# Altium PCB pcb sensor.PcbDoc
Units mm, origin at the board's own origin, x right, y up, seen from the top; angles counter-clockwise.
Board outline 89.99 x 89.99 mm, 2 copper layers (Top Layer, Bottom Layer); 63 components, 46 nets, 179 pads, 16 vias.
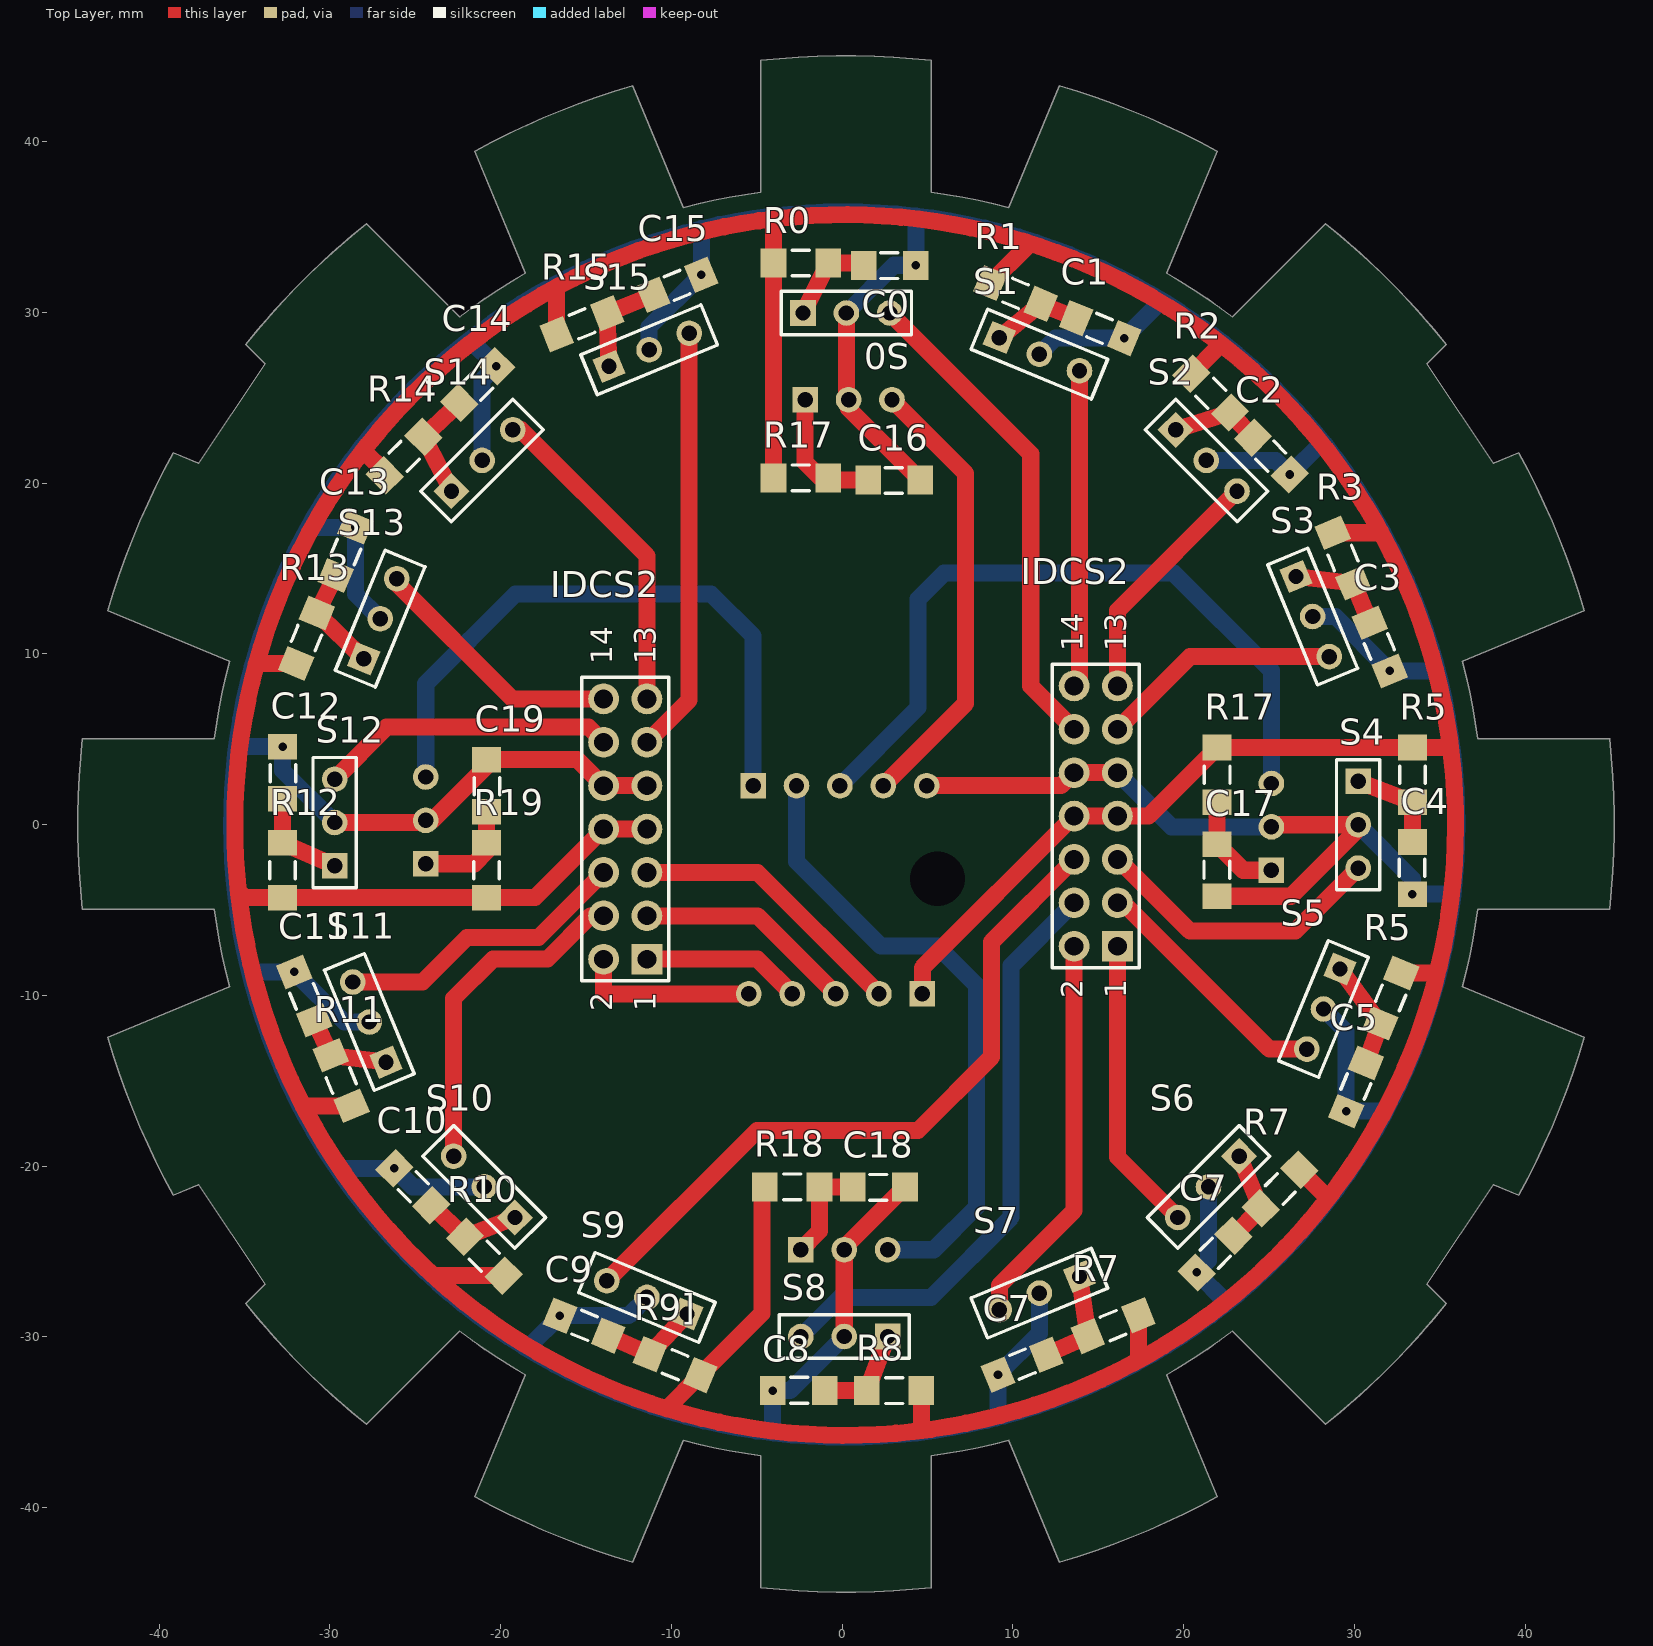
[diagram p0: Top Layer view]
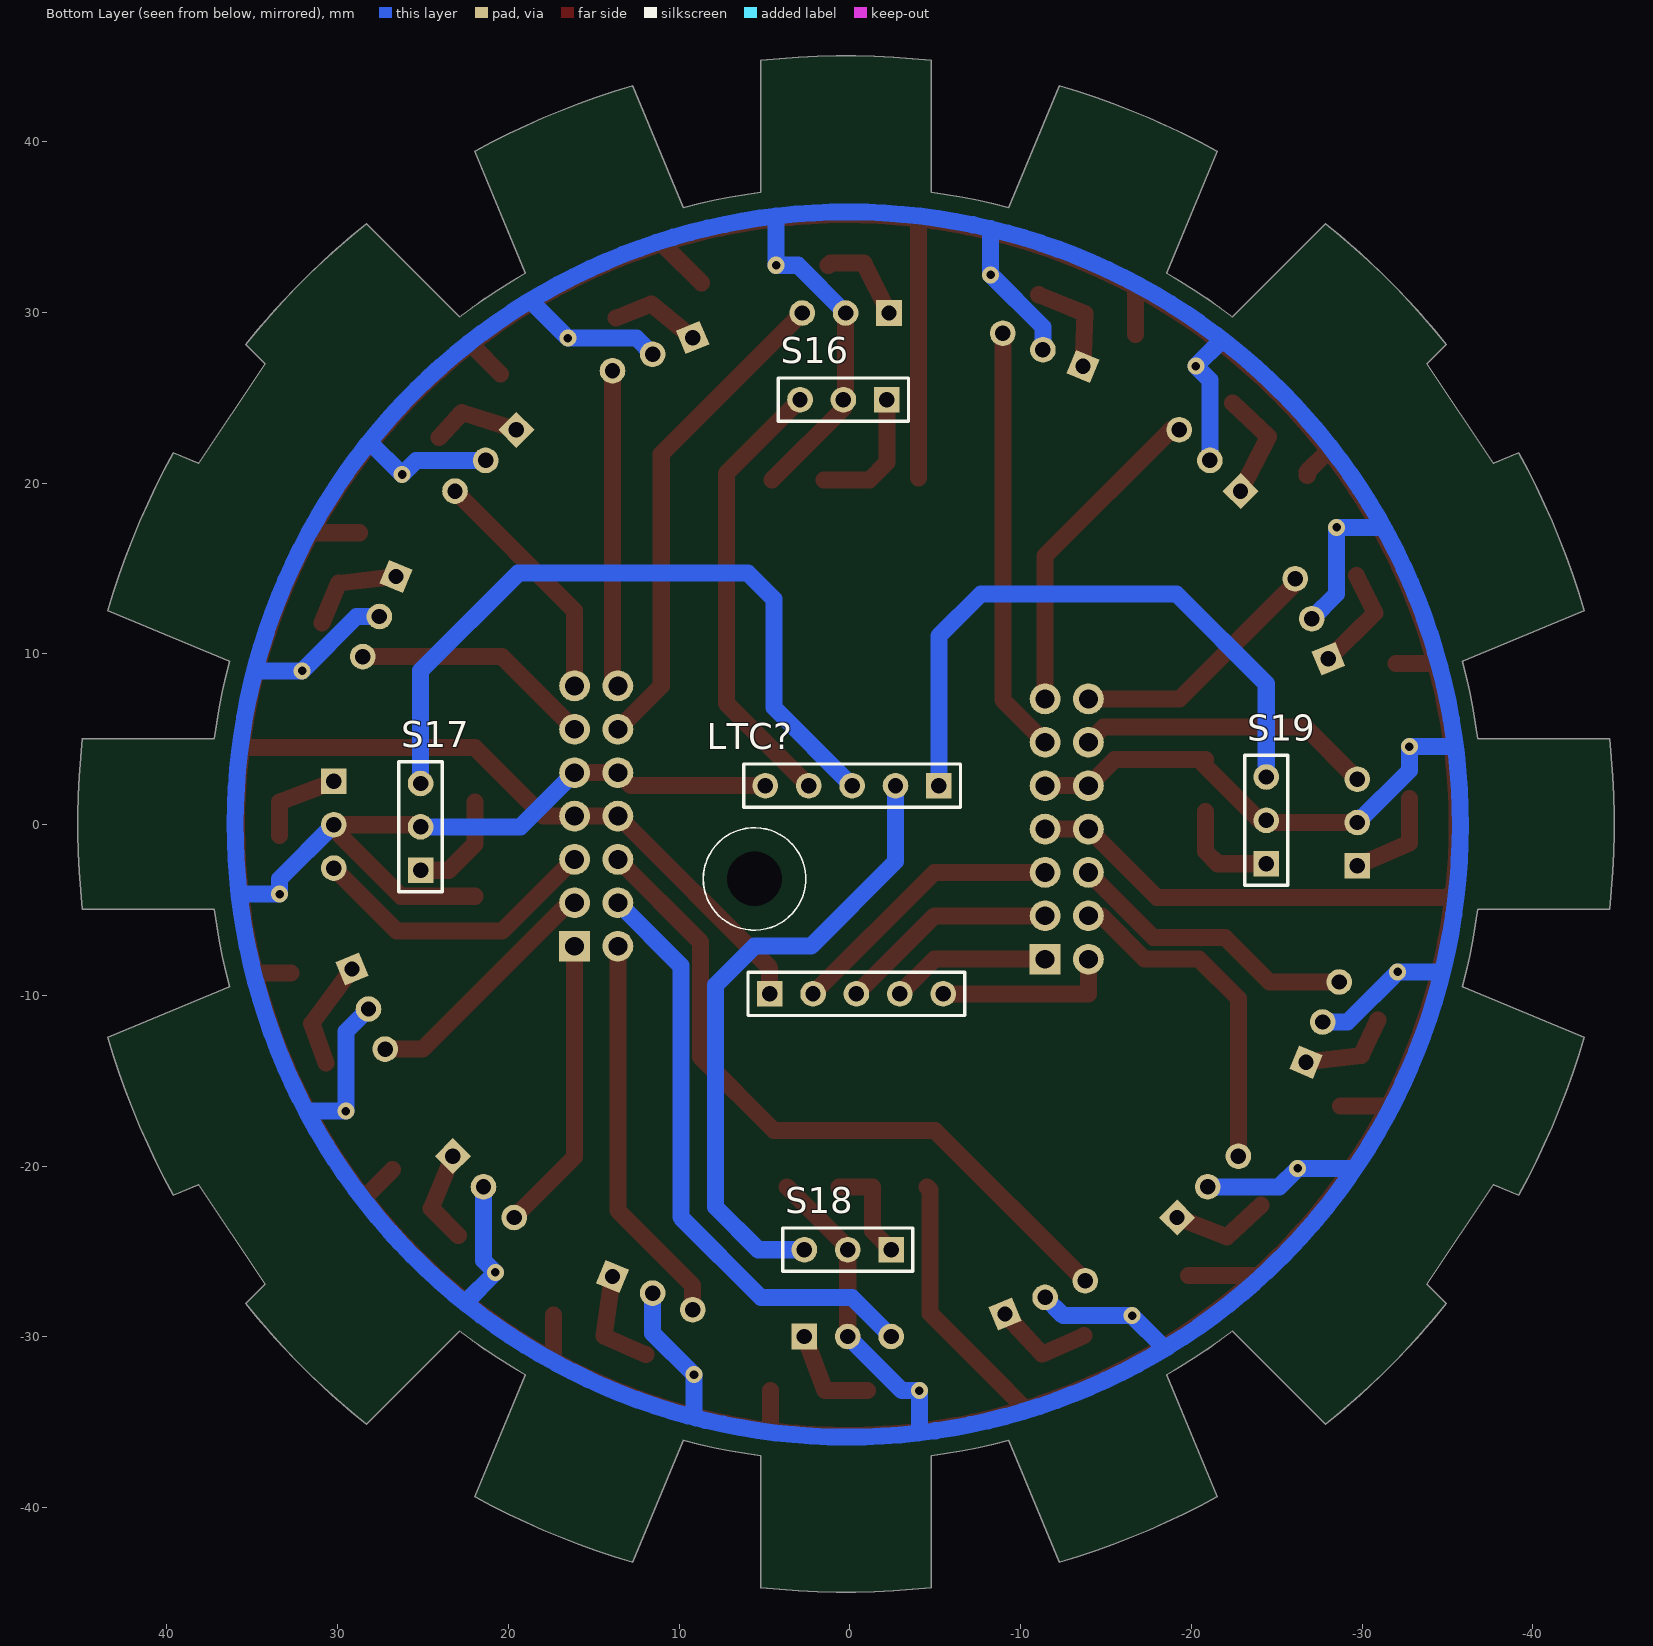
[diagram p1: Bottom Layer view, seen from below]
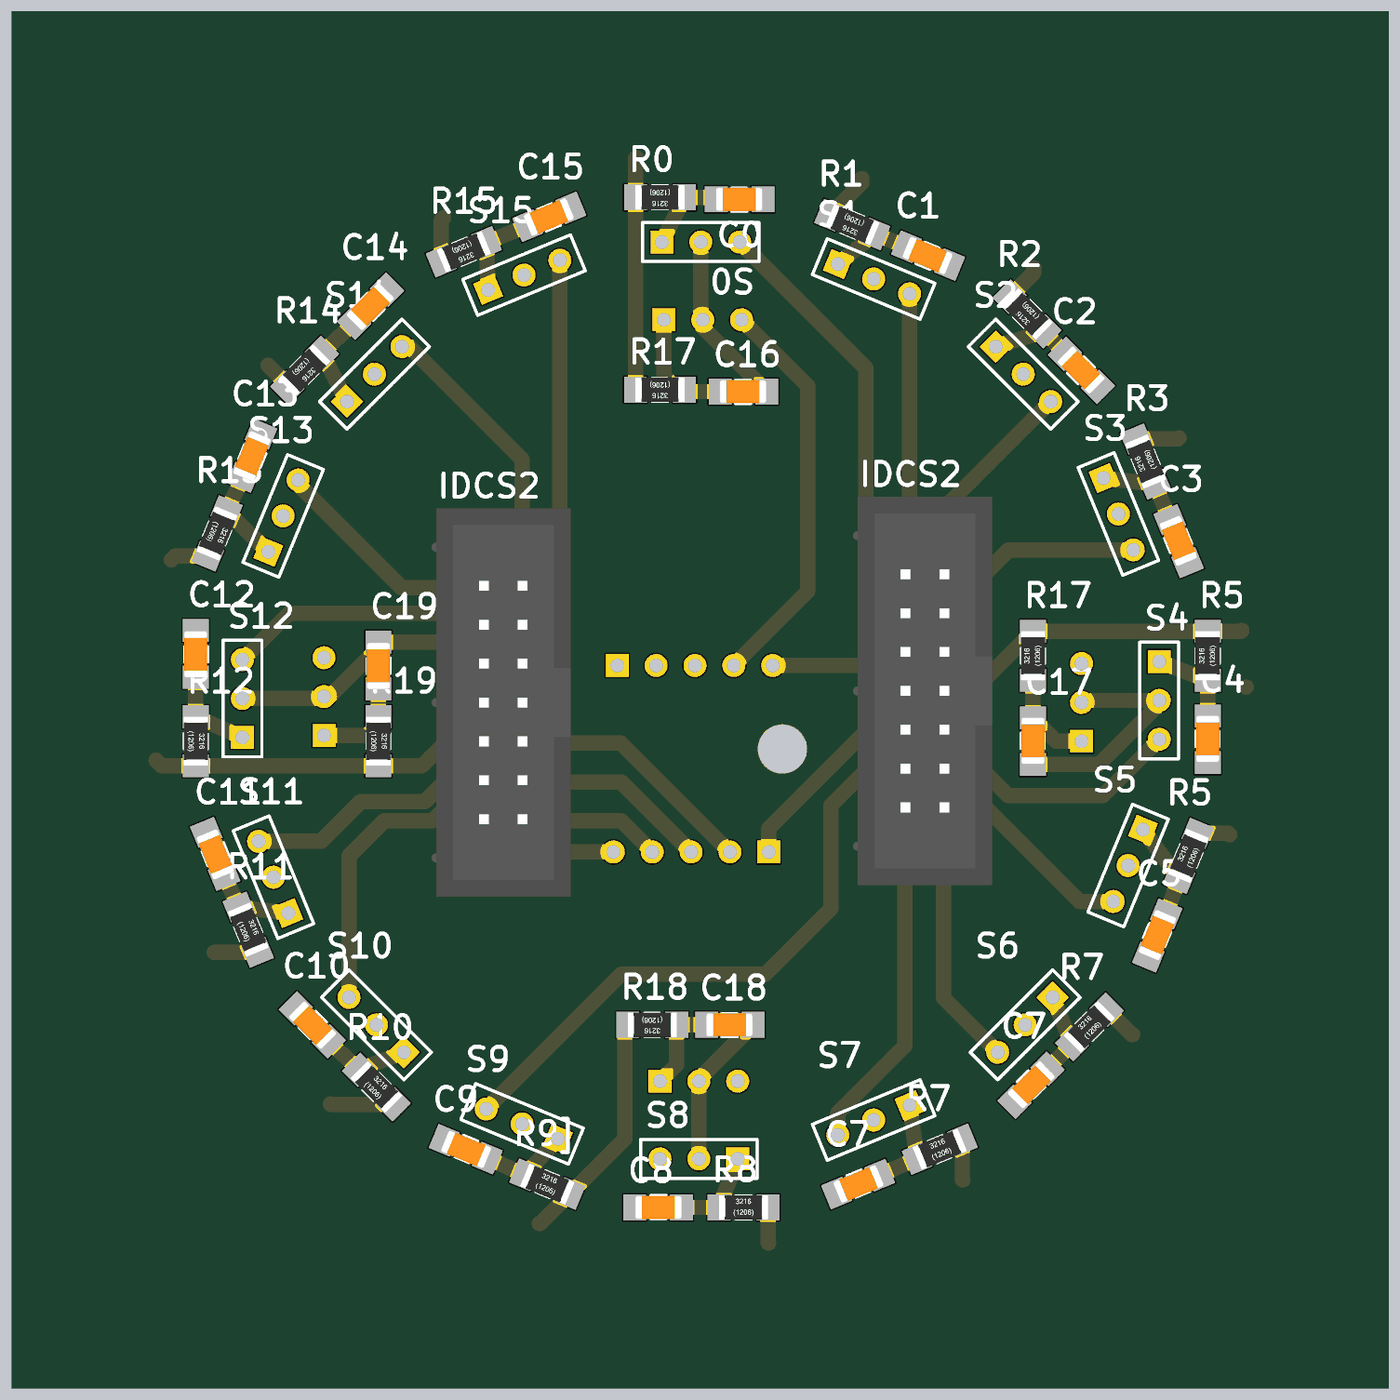
[diagram p2: 3D render of the assembled board from above, using the file's embedded part models]

## Layer stack, top to bottom
Top Solder: solder mask 0.0102, Solder Resist, Dk 3.5
Top Layer: signal copper 0.0356
Dielectric 1: dielectric 0.32, FR-4, Dk 4.8
Bottom Layer: signal copper 0.0356
Bottom Solder: solder mask 0.0102, Solder Resist, Dk 3.5

## Board outline
-34.928,-28.045 ccw(c0.23,0.042) -27.857,-35.116 -22.397,-29.656 ccw(c0.23,0.042) -18.549,-32.228 -21.504,-39.362 ccw(c0.23,0.042) -12.265,-43.189 -9.31,-36.055 ccw(c0.23,0.042) -4.77,-36.958 -4.77,-44.679 ccw(c0.23,0.042) 5.23,-44.679 5.23,-36.958 ccw(c0.23,0.042) 9.77,-36.055 12.725,-43.189 ccw(c0.23,0.042) 21.964,-39.362 19.009,-32.228 ccw(c0.23,0.042) 22.857,-29.656 28.317,-35.116 ccw(c0.23,0.042) 35.388,-28.045 34.254,-26.911 38.152,-21.078 39.634,-21.692 ccw(c0.23,0.042) 43.461,-12.453 36.327,-9.498 ccw(c0.23,0.042) 37.23,-4.958 44.951,-4.958 ccw(c0.23,0.042) 44.951,5.042 37.23,5.042 ccw(c0.23,0.042) 36.327,9.582 43.461,12.537 ccw(c0.23,0.042) 39.634,21.776 38.152,21.162 34.254,26.995 35.388,28.129 ccw(c0.23,0.042) 28.317,35.2 22.857,29.74 ccw(c0.23,0.042) 19.009,32.312 21.964,39.446 ccw(c0.23,0.042) 12.725,43.273 9.77,36.139 ccw(c0.23,0.042) 5.23,37.042 5.23,44.763 ccw(c0.23,0.042) -4.77,44.763 -4.77,37.042 ccw(c0.23,0.042) -9.31,36.139 -12.265,43.273 ccw(c0.23,0.042) -21.504,39.446 -18.549,32.312 ccw(c0.23,0.042) -22.397,29.74 -27.857,35.2 ccw(c0.23,0.042) -34.928,28.129 -33.794,26.995 -37.692,21.162 -39.174,21.776 ccw(c0.23,0.042) -43.001,12.537 -35.867,9.582 ccw(c0.23,0.042) -36.77,5.042 -44.491,5.042 ccw(c0.23,0.042) -44.491,-4.958 -36.77,-4.958 ccw(c0.23,0.042) -35.867,-9.498 -43.001,-12.453 ccw(c0.23,0.042) -39.174,-21.692 -37.692,-21.078 -33.794,-26.911

## Design rules (kind name [scope] priority, off if disabled: settings)
Clearance [All] p1: gap=0.254 ignorepadtopadclearanceinfootprint=FALSE except(0: Arc-Hole Track-Hole SMDPad-Hole THPad-Hole Via-Hole Fill-Hole Poly-Hole Region-Hole Text-Hole)
PolygonConnect [All] p1: connectstyle=Relief reliefconductorwidth=0.254 reliefentries=4 polygonreliefangle="90 Angle" airgapwidth=0.254
RoutingVias [All] p1: holewidth=0.711 width=1.27 viastyle="Through Hole" minholewidth=0.711 minwidth=1.27 maxholewidth=0.711 maxwidth=1.27
SolderMaskExpansion [All] p1: expansion=0.102
Width [All] p1: maxlimit=2 minlimit=0.5 preferedwidth=1
30 further rules are at their usual default settings.

## Classes and differential pairs
component class "sesnor schematic": C0 C1 C2 C3 C4 C5 C7 C8 C9 C10 C11 C12 C13 C14 C15 C16 C17 C18 C19 IDCS2 R0 R1 R2 R3 R5 R7 R8 R9] R10 R11 R12 R13 R14 R15 R17 R18 R19 S0 S1 S2 S3 S4 S5 S6 S7 S8 S9 S10 S11 S12 S13 S14 S15 S16 S17 S18 S19

## Components (designator, comment, footprint, x,y, rotation, side; value= is the part's Value field where it differs from the comment)
C0 "smd" "Cap SMD" 2.794,32.766 r180 top
C1 "smd" "Cap SMD" 15.113,29.083 r157.5 top
C2 "smd" "Cap SMD" 25.146,21.59 r135 top
C3 "smd" "Cap SMD" 31.496,10.414 r112.5 top
C4 "smd" "Cap SMD" 33.401,-2.54 r90 top
C5 "smd" "Cap SMD" 30.099,-15.367 r67.5 top
C7 "smd" "Cap SMD" 10.541,-31.623 r22.5 top
C7 "smd" "Cap SMD" 21.844,-25.146 r45 top
C8 "smd" "Cap SMD" -2.54,-33.147 r0 top
C9 "smd" "Cap SMD" -15.113,-29.337 r337.5 top
C10 "smd" "Cap SMD" -25.146,-21.209 r315 top
C11 "smd" "Cap SMD" -31.496,-10.033 r292.5 top
C12 "smd" "Cap SMD" -32.766,3.048 r270 top
C13 "smd" "Cap SMD" -29.083,16.002 r247.5 top
C14 "smd" "Cap SMD" -21.336,25.781 r225 top
C15 "smd" "Cap SMD" -9.652,31.623 r202.5 top
C16 "smd" "Cap SMD" 3.048,20.193 r180 top
C17 "smd" "Cap SMD" 21.971,-2.666 r90 top
C18 "smd" "Cap SMD" 2.159,-21.209 r180 top
C19 "smd" "Cap SMD" -20.828,2.286 r270 top
IDCS2 "IDC 2X7" "IDC 2X7" -12.319,0 r90 top
IDCS2 "IDC 2X7" "IDC 2X7" 15.24,0.762 r90 top
LTC? "LTC TAK" "LTC TAK" -1.524,-3.175 r0 bottom
R0 "SMD" "Resistor SMD 1206" -2.413,32.893 r180 top
R1 "SMD" "Resistor SMD 1206" 10.16,31.115 r157.5 top
R2 "SMD" "Resistor SMD 1206" 21.59,25.273 r135 top
R3 "SMD" "Resistor SMD 1206" 29.337,15.621 r112.5 top
R5 "SMD" "Resistor SMD 1206" 32.131,-10.16 r67.5 top
R5 "SMD" "Resistor SMD 1206" 33.401,2.921 r90 top
R7 "SMD" "Resistor SMD 1206" 15.875,-29.337 r22.5 top
R7 "SMD" "Resistor SMD 1206" 25.654,-21.336 r45 top
R8 "SMD" "Resistor SMD 1206" 3.048,-33.147 r0 top
R9] "SMD" "Resistor SMD 1206" -9.779,-31.623 r337.5 top
R10 "SMD" "Resistor SMD 1206" -20.955,-25.273 r315 top
R11 "SMD" "Resistor SMD 1206" -29.337,-14.986 r292.5 top
R12 "SMD" "Resistor SMD 1206" -32.766,-2.667 r270 top
R13 "SMD" "Resistor SMD 1206" -31.369,10.922 r247.5 top
R14 "SMD" "Resistor SMD 1206" -25.654,21.59 r225 top
R15 "SMD" "Resistor SMD 1206" -15.24,29.337 r202.5 top
R17 "SMD" "Resistor SMD 1206" 21.971,2.921 r90 top
R17 "SMD" "Resistor SMD 1206" -2.413,20.32 r180 top
R18 "SMD" "Resistor SMD 1206" -2.921,-21.209 r180 top
R19 "SMD" "Resistor SMD 1206" -20.828,-2.667 r270 top
S0 "Header 3" HDR1X3 -2.286,29.972 r0 top
S1 "Header 3" HDR1X3 9.21,28.531 r337.5 top
S2 "Header 3" HDR1X3 19.54,23.132 r315 top
S3 "Header 3" HDR1X3 26.587,14.539 r292.5 top
S4 "Header 3" HDR1X3 30.226,2.54 r270 top
S5 "Header 3" HDR1X3 29.166,-8.448 r247.5 top
S6 "Header 3" HDR1X3 23.259,-19.413 r225 top
S7 "Header 3" HDR1X3 13.904,-26.46 r202.5 top
S8 "Header 3" HDR1X3 2.667,-29.972 r180 top
S9 "Header 3" HDR1X3 -9.083,-28.658 r157.5 top
S10 "Header 3" HDR1X3 -19.159,-23.005 r135 top
S11 "Header 3" HDR1X3 -26.714,-13.904 r112.5 top
S12 "Header 3" HDR1X3 -29.718,-2.413 r90 top
S13 "Header 3" HDR1X3 -28.023,9.718 r67.5 top
S14 "Header 3" HDR1X3 -22.878,19.54 r45 top
S15 "Header 3" HDR1X3 -13.65,26.841 r22.5 top
S16 "Header 3" HDR1X3 -2.159,24.892 r0 bottom
S17 "Header 3" HDR1X3 25.146,-2.667 r90 bottom
S18 "Header 3" HDR1X3 -2.413,-24.892 r0 bottom
S19 "Header 3" HDR1X3 -24.384,-2.286 r90 bottom

## Footprints (in the part's own frame and the unit in brackets; to place one, negate y for a bottom-side part, rotate by r counter-clockwise, add the part's x,y. Pads: shape width x height; smd on the part's side, far side on the other; paste and mask are expansions set on the pad)
"Cap SMD" [mm]
  rect 1.5x1.7 smd: 1(-1.525,0) 2(1.525,0)
  silkscreen extent -0.47,-0.72 0.53,0.78, body extent -1.49,-0.76 1.55,0.76, height 0.75
HDR1X3 [mm] "Connector; Header; 3 Position"
  rect 1.5x1.5 hole 0.9: 1(0,0)
  round 1.5 hole 0.9: 2(2.54,0) 3(5.08,0)
  silkscreen extent -1.27,-1.27 6.35,1.27
"IDC 2X7" [mm]
  rect 1.8x1.8 hole 1.1 unplated: 1(-7.874,-0.889)
  round 1.8 hole 1.1 unplated: 2(-7.874,1.651) 3(-5.334,-0.889) 4(-5.334,1.651) 5(-2.794,-0.889) 6(-2.794,1.651) 7(-0.254,-0.889) 8(-0.254,1.651) 9(2.286,-0.889) 10(2.286,1.651) 11(4.826,-0.889) 12(4.826,1.651) 13(7.366,-0.889) 14(7.366,1.651)
  silkscreen extent -9.14,-2.16 8.64,2.92, body extent -12.83,-4.06 12.55,5.04, height 9.3
"LTC TAK" [mm]
  rect 1.5x1.5 hole 0.9: 1(6.223,6.731) 6(-3.683,-5.461)
  round 1.5 hole 0.9: 2(3.683,6.731) 3(1.143,6.731) 4(-1.397,6.731) 5(-3.937,6.731) 7(-1.143,-5.461) 8(1.397,-5.461) 9(3.937,-5.461) 10(6.477,-5.461)
  round 1.524 hole 3.2: 2(7.112,0)
  silkscreen extent -5.21,-6.73 10.11,8
"Resistor SMD 1206" [mm]
  rect 1.5x1.7 smd: 1(-1.6,0) 2(1.6,0)
  silkscreen extent -0.5,-0.75 0.5,0.75, body extent -1.6,-0.8 1.6,0.8, height 0.55

## Part data
C0 C1 C2 C3 C4 C5 C7 C7 C8 C9 C10 C11 C12 C13 C14 C15 C16 C17 C18 C19: library part "Cap SMD"
R0 R1 R2 R3 R5 R5 R7 R7 R8 R9] R10 R11 R12 R13 R14 R15 R17 R17 R18 R19: library part "Res SMD"
S0 S1 S2 S3 S4 S5 S6 S7 S8 S9 S10 S11 S12 S13 S14 S15 S16 S17 S18 S19: "Header, 3-Pin", LatestRevisionDate=17-Jul-2002, LatestRevisionNote="Re-released for DXP Platform.", Publisher="Altium Limited"

## Via types
v1: diameter 1, hole 0.5, Top Layer to Bottom Layer, 16 vias

## Nets (pads, with @x,y where several pads share a name; then routed paths per layer and width w, separated by ;. In a path a pad name is that pad's centre, name@x,y a point inside that pad or via, vN(x,y) a via of type N, cw(c..) or ccw(c..) an arc to the next point about the centre after c; other vN are vias at no path point)
CR1: C0.2 R0.1 S0.1 | length 5.4
  Top Layer w1: S0.1 R0.1 1.142,32.893 C0.2
CR2: C1.2 R1.1 S1.1 | length 5.4
  Top Layer w1: S1.1 R1.1 C1.2
CR3: C2.2 R2.1 S2.1 | length 5.3
  Top Layer w1: S2.1 R2.1 C2.2
CR4: C3.2 R3.1 S3.1 | length 5.9
  Top Layer w1: S3.1 R3.1 C3.2
CR5: C4.2 R5.1@33.401,1.321 S4.1 | length 5.4
  Top Layer w1: S4.1 33.401,1.321 C4.2@33.401,-0.635
CR6: C5.2 R5.1@31.519,-11.638 S5.1 | length 6.4
  Top Layer w1: S5.1 31.519,-11.638 C5.2
CR7: C7.2@22.922,-24.068 R7.1@24.523,-22.467 S6.1 | length 5.6
  Top Layer w1: C7.2@22.922,-24.068 24.523,-22.467 S6.1
CR8: C7.2@11.95,-31.039 R7.1@14.397,-29.949 S7.1 | length 6.2
  Top Layer w1: C7.2@11.95,-31.039 14.397,-29.949 S7.1
CR9: C8.2 R8.1 S8.1 | length 5.9
  Top Layer w1: C8.2 R8.1 S8.1
CR10: C9.2 R9].1 S9.1 | length 5.9
  Top Layer w1: C9.2 R9].1 S9.1
CR11: C10.2 R10.1 S10.1 | length 5.9
  Top Layer w1: C10.2 R10.1 S10.1
CR12: C11.2 R11.1 S11.1 | length 5.5
  Top Layer w1: C11.2 R11.1 S11.1
CR13: C12.2 R12.1 S12.1 | length 5.9
  Top Layer w1: C12.2 R12.1 S12.1
CR14: C13.2 R13.1 S13.1 | length 6.3
  Top Layer w1: C13.2 R13.1 S13.1
CR15: C14.2 R14.1 S14.1 | length 6.5
  Top Layer w1: S14.1 R14.1 C14.2
CR16: C15.2 R15.1 S15.1 | length 6
  Top Layer w1: S15.1 R15.1 C15.2
CR17: C16.2 R17.1@-0.813,20.32 S16.1 | length 7.8
  Top Layer w1: S16.1 -2.159,21.209 -1.143,20.193 C16.2
CR18: C17.2 R17.1@21.971,1.321 S17.1 | length 6.3
  Top Layer w1: R17.1@21.971,1.321 C17.2 23.497,-2.667 S17.1
CR19: C18.2 R18.1 S18.1 | length 6.1
  Top Layer w1: S18.1 -1.321,-23.8 R18.1 C18.2
CR20: C19.2 R19.1 S19.1 | length 6.2
  Top Layer w1: S19.1 -21.539,-2.286 -20.828,-1.575 R19.1 C19.2
GND: C0.1 C1.1 C2.1 C3.1 C4.1 C5.1 C7.1 C8.1 C9.1 C10.1 C11.1 C12.1 C13.1 C14.1 C15.1 C16.1 C17.1 C18.1 C19.1 IDCS2.9 IDCS2.10 LTC?.10 S0.2 S1.2 S2.2 S3.2 S4.2 S5.2 S6.2 S7.2 S8.2 S9.2 S10.2 S11.2 S12.2 S13.2 S14.2 S15.2 S16.2 S17.2 S18.2 S19.2 | length 438.1
  Top Layer w1: S12.2 -24.511,0.127 S19.2 -24.004,0.254 C19.1@-20.637,3.621 ; C19.1 -15.495,3.811 -13.97,2.286 IDCS2.9@-11.43,2.286 ; S8.2 S18.2 0.127,-24.766 C18.1 ; S0.2 0.254,25.019 S16.2 0.381,24.385 C16.1 ; LTC?.10 12.827,2.286 13.589,3.048 IDCS2.9@16.129,3.048 ; C17.1 26.289,-4.191 30.226,-0.254 S4.2 25.273,0 S17.2
  Bottom Layer w1: -35.462,4.576 -35.459,4.573 v1(-32.766,4.573) -32.766,3.175 S12.2 ; -34.656,-8.791 -34.488,-8.624 v1(-32.08,-8.624) -29.147,-11.557 S11.2 ; -31.285,17.353 -31.227,17.411 v1(-28.499,17.411) -28.499,13.513 S13.2 ; -29.503,-20.22 -29.414,-20.131 v1(-26.224,-20.131) -25.146,-21.209 S10.2 ; -21.75,28.452 -21.75,28.351 v1(-20.258,26.859) -21.082,26.035 S14.2 ; -18.364,-30.734 -18.364,-30.596 v1(-16.522,-28.753) -12.497,-28.753 S9.2 ; S15.2 -11.303,29.147 v1(-8.243,32.207) -8.243,34.895 -8.249,34.901 ; -3.96,-35.632 -4.065,-35.527 v1(-4.065,-33.147) -3.048,-33.147 S8.2 ; S0.2 3.048,32.766 v1(4.319,32.766) 4.319,35.637 4.328,35.646 ; 9.005,-34.749 9.132,-34.622 v1(9.132,-32.207) 11.557,-29.782 S7.2 ; S1.2 12.497,28.499 v1(16.522,28.499) 18.663,30.64 18.816,30.64 ; IDCS2.9@16.129,3.048 19.304,-0.127 S17.2 ; S2.2 25.4,21.336 v1(26.224,20.512) 28.131,22.418 28.15,22.418 ; S6.2 21.463,-25.527 v1(20.766,-26.224) 22.533,-27.992 22.533,-28.008 ; S3.2 28.893,12.192 v1(32.08,9.005) 34.716,9.005 34.831,9.119 ; S5.2 29.515,-12.116 v1(29.515,-16.776) 31.795,-16.776 31.821,-16.802 ; S4.2 33.401,-3.175 v1(33.401,-4.065) 35.768,-4.065 35.773,-4.059 ; 35.94,2.174 ccw(c0.126,0.014) 35.941,2.159
L16: LTC?.9 S16.3 | length 26.4
  Top Layer w1: LTC?.9 7.239,7.112 7.239,20.574 S16.3
L17: LTC?.8 S17.3 | length 43.1
  Bottom Layer w1: LTC?.8 4.445,6.858 4.445,13.208 5.969,14.732 19.431,14.732 25.146,9.017 S17.3
L18: LTC?.7 S18.3 | length 37.2
  Bottom Layer w1: LTC?.7 -2.667,-2.159 2.286,-7.112 5.588,-7.112 7.874,-9.398 7.874,-22.388 5.37,-24.892 S18.3
L19: LTC?.6 S19.3 | length 36.6
  Bottom Layer w1: S19.3 -24.384,8.255 -19.126,13.513 -7.671,13.513 -5.207,11.049 LTC?.6
S0: IDCS2.12@13.589,5.588 S0.3 | length 28.9
  Top Layer w1: S0.3 11.049,21.717 11.049,8.128 IDCS2.12@13.589,5.588
S1: IDCS2.14@13.589,8.128 S1.3 | length 18.6
  Top Layer w1: IDCS2.14@13.589,8.128 13.904,8.443 S1.3
S2: IDCS2.13@16.129,8.128 S2.3 | length 14.3
  Top Layer w1: IDCS2.13@16.129,8.128 16.129,12.537 S2.3
S3: IDCS2.11@16.129,5.588 S3.3 | length 14.2
  Top Layer w1: IDCS2.11@16.129,5.588 20.386,9.845 S3.3
S4: IDCS2.5@16.129,-2.032 S4.3 | length 17.4
  Top Layer w1: IDCS2.5@16.129,-2.032 16.175,-2.032 20.366,-6.223 26.543,-6.223 S4.3
S5: IDCS2.3@16.129,-4.572 S5.3 | length 14.6
  Top Layer w1: IDCS2.3@16.129,-4.572 16.455,-4.572 25.025,-13.142 S5.3
S6: IDCS2.1@16.129,-7.112 S6.3 | length 17.4
  Top Layer w1: IDCS2.1@16.129,-7.112 16.129,-19.467 S6.3
S7: IDCS2.2@13.589,-7.112 S7.3 | length 23.1
  Top Layer w1: S7.3 9.21,-26.985 13.589,-22.606 IDCS2.2@13.589,-7.112
S8: IDCS2.4@13.589,-4.572 S8.3 | length 35.2
  Bottom Layer w1: S8.3 -0.127,-27.686 5.207,-27.686 9.906,-22.987 9.906,-8.255 IDCS2.4@13.589,-4.572
S9: IDCS2.6@13.589,-2.032 S9.3 | length 41.5
  Top Layer w1: S9.3 -4.97,-17.907 4.445,-17.907 8.763,-13.589 8.763,-6.858 IDCS2.6@13.589,-2.032
S10: IDCS2.4@-13.97,-5.334 S10.3 | length 19.8
  Top Layer w1: S10.3@-22.751,-19.177 -22.751,-10.178 -20.431,-7.858 -17.261,-7.858 -14.737,-5.334 IDCS2.4@-13.97,-5.334
S11: IDCS2.6@-13.97,-2.794 S11.3 | length 17.3
  Top Layer w1: S11.3 -24.577,-9.21 -21.971,-6.604 -17.78,-6.604 IDCS2.6@-13.97,-2.794
S12: IDCS2.12@-13.97,4.826 S12.3 | length 17.4
  Top Layer w1: S12.3 -26.67,5.715 -14.859,5.715 IDCS2.12@-13.97,4.826
S13: IDCS2.14@-13.97,7.366 S13.3 | length 15.2
  Top Layer w1: S13.3 -26.079,14.141 -19.304,7.366 IDCS2.14@-13.97,7.366
S14: IDCS2.13@-11.43,7.366 S14.3 | length 19.3
  Top Layer w1: S14.3 -18.814,23.132 -11.43,15.748 IDCS2.13@-11.43,7.366
S15: IDCS2.11@-11.43,4.826 S15.3 | length 25
  Top Layer w1: IDCS2.11@-11.43,4.826 -8.956,7.3 S15.3
S16: IDCS2.5@-11.43,-2.794 LTC?.2@2.159,-9.906 | length 16.5
  Top Layer w1: IDCS2.5@-11.43,-2.794 -4.953,-2.794 LTC?.2@2.159,-9.906
S17: IDCS2.3@-11.43,-5.334 LTC?.3 | length 12.9
  Top Layer w1: IDCS2.3@-11.43,-5.334 -4.953,-5.334 LTC?.3
S18: IDCS2.1@-11.43,-7.874 LTC?.4 | length 9.4
  Top Layer w1: IDCS2.1@-11.43,-7.874 -4.953,-7.874 LTC?.4
S19: IDCS2.2@-13.97,-7.874 LTC?.5 | length 10.5
  Top Layer w1: IDCS2.2@-13.97,-7.874 -13.97,-9.906 LTC?.5
VCC: IDCS2.7 IDCS2.8 LTC?.1 R0.2 R1.2 R2.2 R3.2 R5.2 R7.2 R8.2 R9].2 R10.2 R11.2 R12.2 R13.2 R14.2 R15.2 R17.2 R18.2 R19.2 | length 351.3
  Top Layer w1: -35.356,-3.901 -34.99,-4.267 R12.2 R19.2 -17.983,-4.267 -13.97,-0.254 IDCS2.7@-11.43,-0.254 ; -34.362,9.189 -34.107,9.444 R13.2 ; -31.557,-16.471 -31.55,-16.464 R11.2 ; -28.042,21.923 -26.785,20.667 R14.2 ; -23.962,-26.383 -23.94,-26.404 R10.2 ; R15.2 -16.718,31.407 -16.554,31.571 ; -10.297,-34.196 -10.262,-34.196 R9].2 -4.699,-28.633 -4.699,-21.387 R18.2 ; R17.2@-4.013,20.32 R0.2 -4.013,35.434 -3.958,35.489 ; R8.2 4.648,-35.439 4.689,-35.48 ; LTC?.1 4.699,-8.382 13.589,0.508 16.129,0.508 17.958,0.508 21.971,4.521 33.401,4.521 35.569,4.521 35.63,4.582 ; R1.2 10.782,33.827 10.782,34.121 ; R7.2@17.353,-28.725 17.353,-31.315 17.389,-31.351 ; R2.2 22.032,27.978 22.032,28.273 ; R7.2@26.785,-20.205 28.427,-21.847 28.489,-21.847 ; R3.2 31.465,17.099 31.528,17.163 ; R5.2@32.743,-8.682 34.747,-8.682 34.839,-8.773 ; 35.916,0.873 cw(c0.18,-0.018) 35.916,0.876
pads on no net: LTC?.2@5.588,-3.175

## Silkscreen, mask and mechanical layers (free items; w line width, h text height)
Mechanical 1:
  circle w0.013: c-33.249,-22.328 r1.5
  circle w0.013: c-33.249,22.412 r1.5
  circle w0.013: c33.709,22.412 r1.5
  circle w0.013: c33.709,-22.328 r1.5
  circle w0.013: c0.738,0.804 r30
  lines w0.013: -43.881,-0.085 46.119,-0.085 ; -39.059,-15.274 44.091,19.168 ; -35.884,15.866 47.266,-18.576 ; -31.59,-31.778 32.05,31.862 ; -31.59,31.862 32.05,-31.778 ; -16.991,-41.533 17.451,41.617 ; -16.991,41.617 17.451,-41.533 ; 0.103,-46.482 0.103,32.893 ; -44.491,-4.958 cw(c0.23,0.042) -44.491,5.042 -36.77,5.042 cw(c0.23,0.042) -35.867,9.582 -43.001,12.537 cw(c0.23,0.042) -39.174,21.776 -37.692,21.162 -33.794,26.995 -34.928,28.129 cw(c0.23,0.042) -27.857,35.2 -22.397,29.74 cw(c0.23,0.042) -18.549,32.312 -21.504,39.446 cw(c0.23,0.042) -12.265,43.273 -9.31,36.139 cw(c0.23,0.042) -4.77,37.042 -4.77,44.763 cw(c0.23,0.042) 5.23,44.763 5.23,37.042 cw(c0.23,0.042) 9.77,36.139 12.725,43.273 cw(c0.23,0.042) 21.964,39.446 19.009,32.312 cw(c0.23,0.042) 22.857,29.74 28.317,35.2 cw(c0.23,0.042) 35.388,28.129 34.254,26.995 38.152,21.162 39.634,21.776 cw(c0.23,0.042) 43.461,12.537 36.327,9.582 cw(c0.23,0.042) 37.23,5.042 44.951,5.042 cw(c0.23,0.042) 44.951,-4.958 37.23,-4.958 cw(c0.23,0.042) 36.327,-9.498 43.461,-12.453 cw(c0.23,0.042) 39.634,-21.692 38.152,-21.078 34.254,-26.911 35.388,-28.045 cw(c0.23,0.042) 28.317,-35.116 22.857,-29.656 cw(c0.23,0.042) 19.009,-32.228 21.964,-39.362 cw(c0.23,0.042) 12.725,-43.189 9.77,-36.055 cw(c0.23,0.042) 5.23,-36.958 5.23,-44.679 cw(c0.23,0.042) -4.77,-44.679 -4.77,-36.958 cw(c0.23,0.042) -9.31,-36.055 -12.265,-43.189 cw(c0.23,0.042) -21.504,-39.362 -18.549,-32.228 cw(c0.23,0.042) -22.397,-29.656 -27.857,-35.116 cw(c0.23,0.042) -34.928,-28.045 -33.794,-26.911 -37.692,-21.078 -39.174,-21.692 cw(c0.23,0.042) -43.001,-12.453 -35.867,-9.498 cw(c0.23,0.042) -36.77,-4.958 -44.491,-4.958

## Text inside footprints (layer, text, board x,y; h text height)
IDCS2: Top Overlay "13" at -10.922,9.398 h1.27 r90; Top Overlay "14" at -13.462,9.398 h1.27 r90; Top Overlay "1" at -10.922,-10.922 h1.27 r90; Top Overlay "2" at -13.462,-10.922 h1.27 r90
IDCS2: Top Overlay "13" at 16.637,10.16 h1.27 r90; Top Overlay "14" at 14.097,10.16 h1.27 r90; Top Overlay "1" at 16.637,-10.16 h1.27 r90; Top Overlay "2" at 14.097,-10.16 h1.27 r90